# Allegro board backup.brd
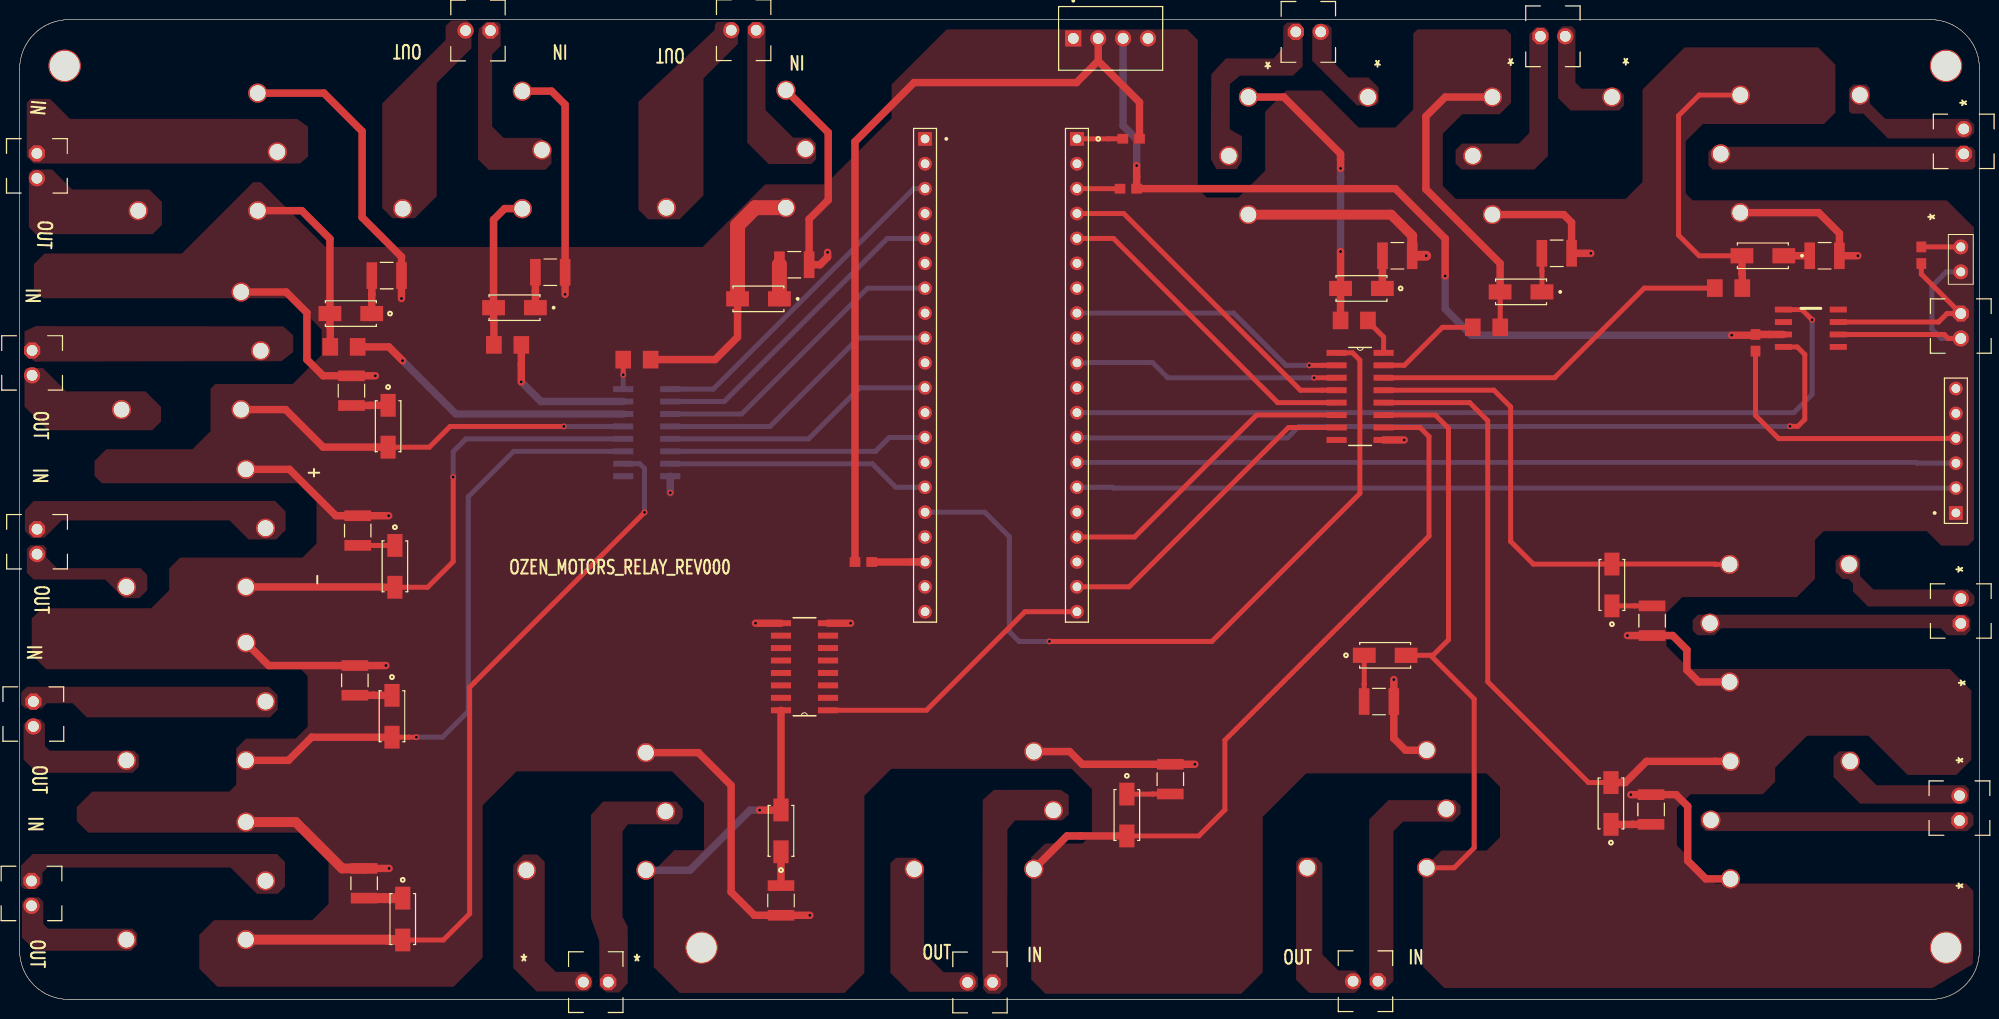
[diagram p0: board, top side]
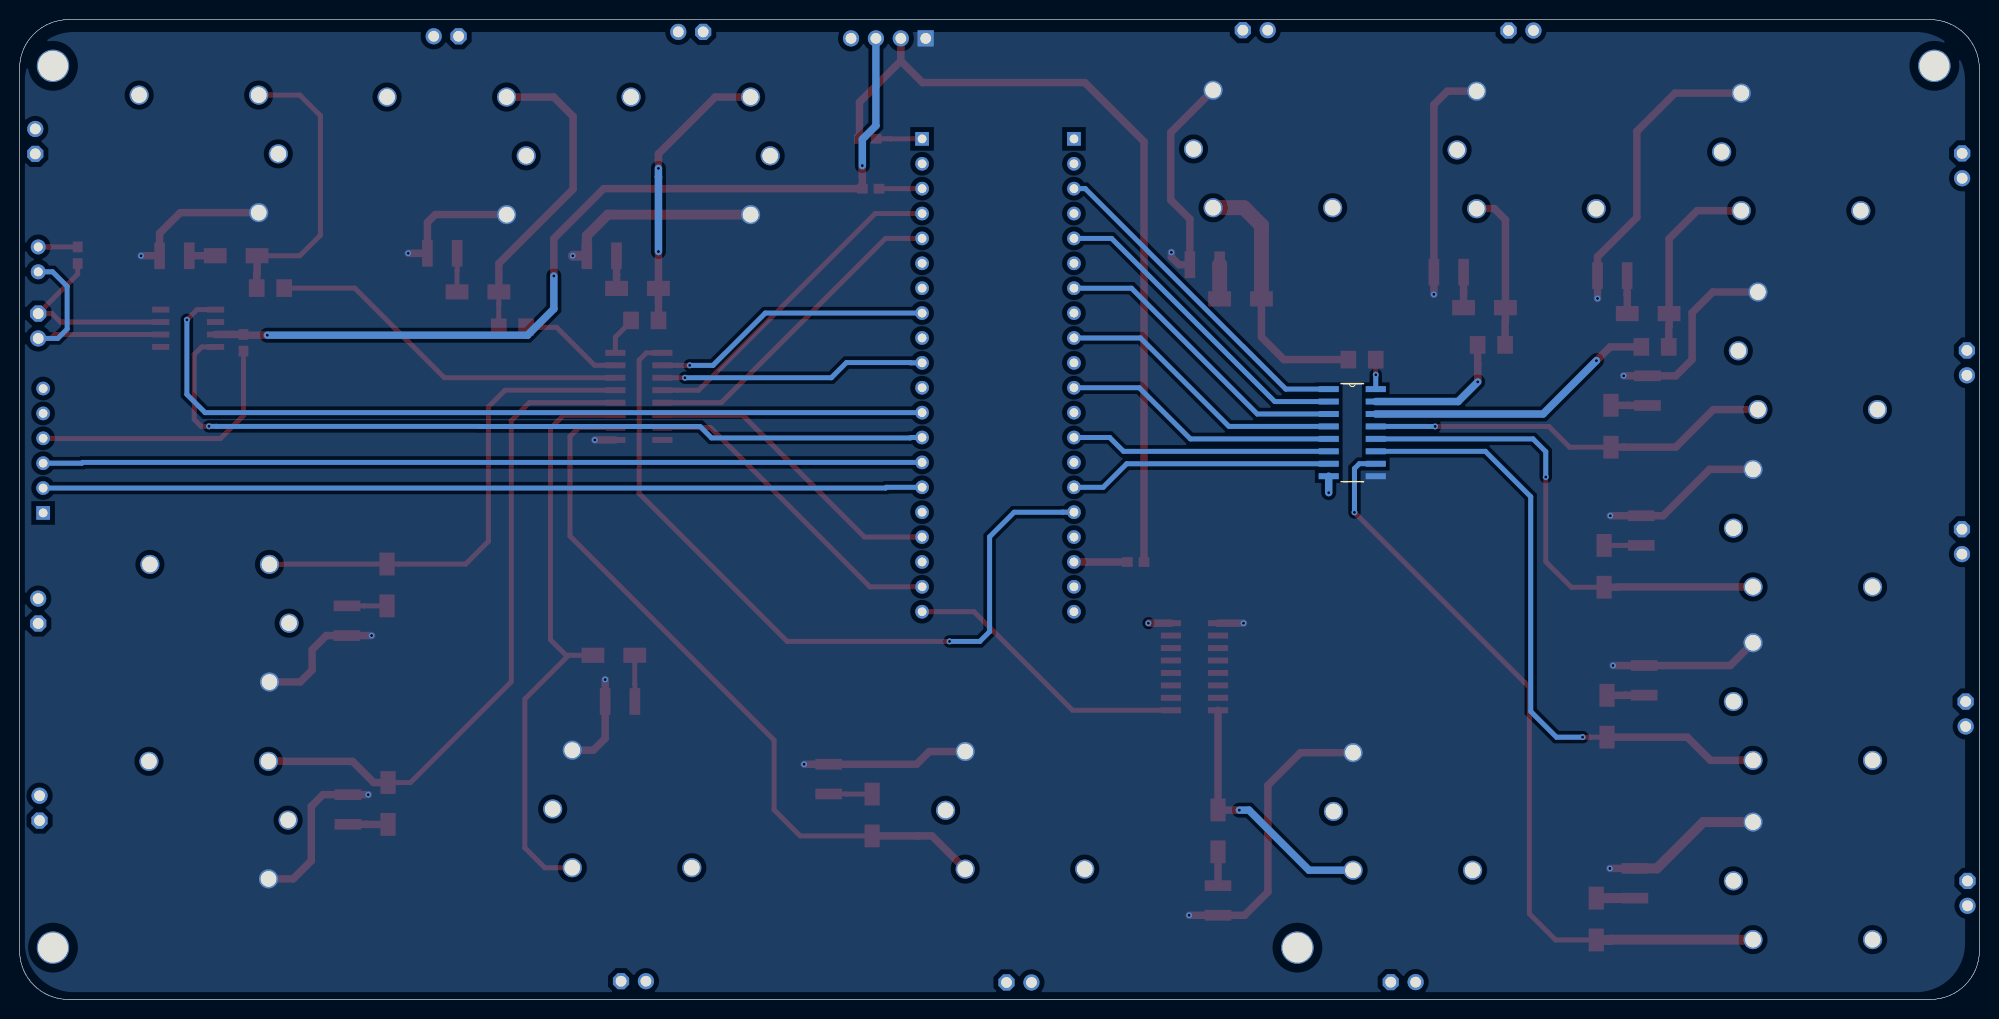
[diagram p1: board, bottom side, seen from below]

Outline 200 x 100 mm; copper layers: TOP, BOTTOM. Coordinates in mm from the lower left corner of the outline.
Outline path: 0,94.88 arc(1.5,98.5) 5.12,100 195,100 arc(196.91,99.62) 198.54,98.54 198.66,98.42 arc(199.65,96.93) 200,95.18 200,4.85 arc(198.58,1.42) 195.16,0 4.96,0 arc(1.45,1.45) 0,4.96 0,94.88 ; 0,95 arc(1.47,98.54) 5,100 195,100 arc(198.54,98.54) 200,95 200,5 arc(198.54,1.46) 195,0 5,0 arc(1.47,1.46) 0,5 0,95

## Placement (name value [footprint] x y rotation side)
D9  DIODE  [DIOM5226X240N]  75.4 71.5 180 top
D10  DIODE  [DIOM5226X240N]  50.5 70.6 180 top
D11  DIODE  [DIOM5226X240N]  33.8 70 180 top
D12  DIODE  [DIOM5226X240N]  37.6 58.5 270 top
D13  DIODE  [DIOM5226X240N]  38.3 44.2 270 top
D14  DIODE  [DIOM5226X240N]  38 28.9 270 top
D15  DIODE  [DIOM5226X240N]  39.1 8.2 270 top
D16  DIODE  [DIOM5226X240N]  77.7 17.2 90 top
D17  DIODE  [DIOM5226X240N]  153.23 72.21 180 top
D18  DIODE  [DIOM5226X240N]  177.9 75.9 180 top
D19  DIODE  [DIOM5226X240N]  162.5 42.3 90 top
D20  DIODE  [DIOM5226X240N]  162.4 20 90 top
D21  DIODE  [DIOM5226X240N]  139.36 35.12 0 top
D22  DIODE  [DIOM5226X240N]  113 18.82 270 top
D23  DIODE  [DIOM5226X240N]  136.94 72.56 180 top
J1  CON2  [1725656]  75.17 98.92 180 top
J2  CON2  [1725656]  48.05 98.89 180 top
J3  CON2  [1725656]  1.76 86.35 270 top
J4  CON2  [1725656]  1.28 66.24 270 top
J5  CON2  [1725656]  1.78 47.99 270 top
J6  CON2  [1725656]  1.4 30.4 270 top
J7  CON2  [1725656]  1.21 12.09 270 top
J8  CON2  [1725656]  60.08 1.76 180 top
J9  CON2  [1725656]  130.24 98.75 0 top
J10  CON2  [1725656]  155.2 98.3 0 top
J11  CON2  [1725656]  198.4 86.3 90 top
J12  CON2  [1725656]  198.1 38.37 90 top
J13  CON2  [1725656]  197.97 18.25 90 top
J14  CON2  [1725656]  138.63 1.86 180 top
J15  CON2  [1725656]  99.28 1.73 180 top
J16  CON20  [TE_2-87224-0]  92.4 63.7 270 top
J17  CON20  [TE_2-87224-0]  107.9 63.7 270 top
J18  CON2  [JUMPER2]  198.1 76.8 270 top
J19  CON2  [1725656]  198.1 70 270 top
J20  UART  [TE_4-103327-6]  197.6 56 90 top
J21  Power  [TE_1546215-4]  111.34 98.08 0 top
NOREF  -  [unnamed]  196.58 95.53 0 top
NOREF#2  -  [unnamed]  4.58 95.53 0 top
NOREF#3  -  [unnamed]  69.58 5.53 0 top
NOREF#4  -  [unnamed]  196.58 5.53 0 top
R1  0 OHM  [RESC3216X65]  63 65.3 0 top
R2  120K  [RESC3225X60N]  79.06 74.98 0 top
R3  120K  [RESC3225X60N]  54.16 74.22 0 top
R4  0 OHM  [RESC3216X65]  49.8 66.8 180 top
R5  120K  [RESC3225X60N]  37.46 73.88 0 top
R6  0 OHM  [RESC3216X65]  33.1 66.6 180 top
R7  120K  [RESC3225X60N]  33.87 62.13 90 top
R8  120K  [RESC3225X60N]  34.51 47.85 90 top
R9  120K  [RESC3225X60N]  34.22 32.56 90 top
R10  120K  [RESC3225X60N]  35.16 11.85 90 top
R11  0 OHM  [RESC3216X65]  136.2 69.3 180 top
R12  120K  [RESC3225X60N]  140.6 75.9 0 top
R13  120K  [RESC3225X60N]  156.87 76.15 0 top
R14  0 OHM  [RESC3216X65]  149.7 68.6 0 top
R15  120K  [RESC3225X60N]  184.2 75.9 0 top
R16  0 OHM  [RESC3216X65]  174.4 72.6 0 top
R17  120K  [RESC3225X60N]  166.6 38.65 270 top
R18  120K  [RESC3225X60N]  166.49 19.38 90 top
R19  120K  [RESC3225X60N]  138.73 30.4 0 top
R20  120K  [RESC3225X60N]  117.43 22.48 90 top
R21  0R  [0603]  86.1 44.64 180 top
R22  0R  [0603]  113.15 82.75 0 top
R23  0R  [0603]  113.44 87.84 0 top
R24  0R  [0603]  177.15 67.02 90 top
R25  120R  [0603]  194.08 75.96 90 top
R26  120K  [RESC3225X60N]  77.7 10.1 270 top
RL1  RELAY SPST  [JSM1A-12V-4]  78.2 92.8 180 top
RL2  RELAY SPST  [JSM1A-12V-4]  51.3 92.7 180 top
RL3  RELAY SPST  [JSM1A-12V-4]  24.3 92.5 180 top
RL4  RELAY SPST  [JSM1A-12V-4]  22.6 72.2 180 top
RL5  RELAY SPST  [JSM1A-12V-4]  23.1 54.1 180 top
RL6  RELAY SPST  [JSM1A-12V-4]  23.1 36.4 180 top
RL7  RELAY SPST  [JSM1A-12V-4]  23.1 18.1 180 top
RL8  RELAY SPST  [JSM1A-12V-4]  125.4 80.1 0 top
RL9  RELAY SPST  [JSM1A-12V-4]  150.3 80.1 0 top
RL10  RELAY SPST  [JSM1A-12V-4]  175.6 80.3 0 top
RL11  RELAY SPST  [JSM1A-12V-4]  174.5 32.4 0 top
RL12  RELAY SPST  [JSM1A-12V-4]  174.6 12.3 0 top
RL13  RELAY SPST  [JSM1A-12V-4]  143.6 25.44 180 top
RL15  RELAY SPST  [JSM1A-12V-4]  103.5 25.3 180 top
RL16  RELAY SPST  [JSM1A-12V-4]  63.92 25.19 180 top
U1  ULN2003A  [SOIC127P600X175-16N]  61.6 53.4 180 bottom
U2  ULN2003A  [SOIC127P600X175-16N]  139.2 57.1 0 top
U3  TJA1050  [SOP8]  182.8 68.5 270 top
U4  ULN2003A  [SOIC127P600X175-16N]  77.7 38.4 180 top

## Library data of the parts
D9 D10 D12-D17 D19-D23 = DIODE_16
D11 D18 = DIODE_17
J1-J15 J18 J19 = CON2_0
J16 = CON20_3
J17 = CON20_2
J20 = CON6_0
J21 = CON4_0
R1 R4 R6 R11 R14 R16 = RESISTOR_4
R2 R3 R5 R7-R10 R12 R13 R15 R17-R20 R26 = RESISTOR_6
R21-R25 = R
RL1 = RELAY SPST_0
RL2 RL4-RL13 RL15 RL16 = RELAY SPST_1
RL3 = RELAY SPST_2
U1 U2 = ULN2003A_1
U3 = TPS563200_1
U4 = ULN2003A_0

## Footprints (pads in the part's own frame, mm; a bottom-side part is the same pattern mirrored in y, then rotated)
0603
  rect 1.1x1 smd: 1(-0.85,0) 2(0.85,0)
1725656
  rrect 1.65x1.65 hole 1.1: 1(0,0)
  round 1.65 hole 1.1: 2(2.54,0)
DIOM5226X240N
  rect 2.33x1.55 smd: A(2.135,0) C(-2.135,0)
JSM1A-12V-4
  round 1.95 hole 1.6: 1(0,0) 2(0,12) 3(-2,6) 4(12.2,12)
JUMPER2
  round 1.524 hole 0.914: 1(0,0) 2(2.54,0)
RESC3216X65
  rect 1.6x1.8 smd: 1(-1.4,0) 2(1.4,0)
RESC3225X60N
  rect 1.09x2.72 smd: 1(-1.515,0) 2(1.515,0)
SOIC127P600X175-16N
  rect 2.057x0.61 smd: 1(-4.801,8.89) 2(-4.801,7.62) 3(-4.801,6.35) 4(-4.801,5.08) 5(-4.801,3.81) 6(-4.801,2.54) 7(-4.801,1.27) 8(-4.801,0) 9(0,0) 10(0,1.27) 11(0,2.54) 12(0,3.81) 13(0,5.08) 14(0,6.35) 15(0,7.62) 16(0,8.89)
SOP8
  rect 0.6x1.75 smd: 1(-1.905,-2.8) 2(-0.635,-2.8) 3(0.635,-2.8) 4(1.905,-2.8) 5(1.905,2.8) 6(0.635,2.8) 7(-0.635,2.8) 8(-1.905,2.8)
TE_2-87224-0
  rect 1.397x1.397 hole 0.889: 1(-24.13,0)
  round 1.397 hole 0.889: 2(-21.59,0) 3(-19.05,0) 4(-16.51,0) 5(-13.97,0) 6(-11.43,0) 7(-8.89,0) 8(-6.35,0) 9(-3.81,0) 10(-1.27,0) 11(1.27,0) 12(3.81,0) 13(6.35,0) 14(8.89,0) 15(11.43,0) 16(13.97,0) 17(16.51,0) 18(19.05,0) 19(21.59,0) 20(24.13,0)
TE_4-103327-6
  rect 1.398x1.398 hole 0.89: 1(-6.35,0)
  round 1.398 hole 0.89: 2(-3.81,0) 3(-1.27,0) 4(1.27,0) 5(3.81,0) 6(6.35,0)
TE_1546215-4
  rect 1.65x1.65 hole 1.1: 1(-3.81,0)
  round 1.65 hole 1.1: 2(-1.27,0) 3(1.27,0) 4(3.81,0)
unnamed
  round 3.302 hole 3.048: (0.013,-0.244)

## Nets
3V3: J21.2 R21.2 R23.2
5VCC: J21.3 R22.2 R24.2 U3.3(VDD)
+12V: J21.1 R2.2 R3.2 R5.2 R7.2 R8.2 R9.2 R10.2 R12.2 R13.2 R15.2 R17.2 R18.2 R19.2 R20.2 R26.2 RL1.1(COIL1) RL2.1 RL3.1 RL4.1 RL5.1 RL6.1 RL7.1 RL8.1 RL9.1 RL10.1 RL11.1 RL12.1 RL13.1 RL15.1 RL16.1 U1.9(COM) U2.9(COM) U4.9(COM)
GND: J16.19 J16.20 J17.2 J20.6 J21.4 U1.8(GND) U2.8(GND) U3.2(VSS) U3.8(RS) U4.8(GND)
F1: J16.4
F2: J16.6
F3: J16.8
F4: J16.10
F5: J16.12
F6: J16.14
F9: J17.6
F10: J17.7
F11: J17.9
F12: J17.11
F13: J17.16
F14: J17.18
P_RX: J17.14 J20.3
P_TX: J17.15 J20.2
PB15/OUT: D15.A RL7.2 U1.10(7C)
R_RLY_IN: D9.A R1.2(B) RL1.2(COIL2)
R_RLY_IN_77343: D23.A R11.2(B) RL8.2
RE1: J1.1 RL1.3(COMMON)
RE1/OUT: J1.2 RL1.4(NO)
RE2: J2.1 RL2.3
RE2/OUT: J2.2 RL2.4
RE3: J3.1 RL3.3
RE3/OUT: J3.2 RL3.4
RE4: J4.1 RL4.3
RE4/OUT: J4.2 RL4.4
RE5: J5.1 RL5.3
RE5/OUT: J5.2 RL5.4
RE6: J6.1 RL6.3
RE6/OUT: J6.2 RL6.4
RE7: J7.1 RL7.3
RE7/OUT: J7.2 RL7.4
RE8: J9.1 RL8.3
RE8/OUT: J9.2 RL8.4
RE9: J10.1 RL9.3
RE9/OUT: J10.2 RL9.4
RE10: J11.1 RL10.3
RE10/OUT: J11.2 RL10.4
RE11: J12.1 RL11.3
RE11/OUT: J12.2 RL11.4
RE12: J13.1 RL12.3
RE12/OUT: J13.2 RL12.4
RE13: J14.1 RL13.3
RE13/OUT: J14.2 RL13.4
RE14: D22.A RL15.2 U2.10(7C)
RE14/OUT: J15.2 RL15.4
RE14IN: J15.1 RL15.3
RE15: J8.1 RL16.3
RE15/OUT: J8.2 RL16.4
REL1: J16.3 U1.1(1B)
REL2: J16.5 U1.2(2B)
REL3: J16.7 U1.3(3B)
REL4: J16.9 U1.4(4B)
REL5: J16.11 U1.5(5B)
REL6: J16.13 U1.6(6B)
REL7: J16.15 U1.7(7B)
REL8: J16.16 U2.1(1B)
REL9: J17.8 U2.2(2B)
REL10: J17.10 U2.3(3B)
REL11: J17.4 U2.4(4B)
REL12: J17.5 U2.5(5B)
REL13: J17.17 U2.6(6B)
REL14: J17.19 U2.7(7B)
REL15: J17.20 U4.1(1B)
RXD: J17.13 U3.4(RXD)
TXD: J17.12 U3.1(TXD)
Y_RLY_IN: D11.A R6.2(B) RL3.2
Y_RLY_IN_77347: D18.A R16.2(B) RL10.2
N62759: J17.1 R23.1
N63115: J19.1 R25.1 U3.7(CANH)
N63135: J18.2 J19.2 U3.6(CANL)
N63175: J18.1 R25.2
N63380: J17.3 R22.1
N65482: J16.18 R21.1
N68083: D10.A R4.2(B) RL2.2
N68351: D12.A RL4.2 U1.13(4C)
N68452: D13.A RL5.2 U1.12(5C)
N68553: D14.A RL6.2 U1.11(6C)
N75685: D16.A RL16.2 U4.16(1C)
N75693: D16.C R26.1
N77327: D18.C R15.1
N77341: D23.C R12.1
N77357: R11.1(A) U2.16(1C)
N77361: R16.1(A) U2.14(3C)
N77381: R14.1(A) U2.15(2C)
N77393: D17.C R13.1
N77395: D17.A R14.2(B) RL9.2
N77409: D19.C R17.1
N77411: D19.A RL11.2 U2.13(4C)
N77427: D20.C R18.1
N77429: D20.A RL12.2 U2.12(5C)
N77445: D21.C R19.1
N77447: D21.A RL13.2 U2.11(6C)
N77463: D22.C R20.1
N80676: J20.4 R24.1
N20681583: D11.C R5.1
N20681625: D9.C R2.1
N20681734: R1.1(A) U1.16(1C)
N20681738: R6.1(A) U1.14(3C)
N20741071: R4.1(A) U1.15(2C)
N20741150: D10.C R3.1
N20741386: D12.C R7.1
N20741709: D13.C R8.1
N20741894: D14.C R9.1
N20742069: D15.C R10.1

Pads without a net: J16 1 2 17; J20 1 5; U3 5; U4 2 3 4 5 6 7 10 11 12 13 14 15

## Via types
v1: diameter 0.61, hole 0.305, TOP to BOTTOM, 37 vias

## Routing (per net, layer and track width the routed paths; a pad name or vN(x,y) marks a point on that pad's centre or on a via; arc(x,y) is an arc through that point)
3V3: length 83.1
  TOP w0.762: 110.07,95.79 114.29,91.57 R23.2 ; 110.07,95.79 J21.2 ; 110.07,95.79 107.86,93.57 91.28,93.57 85.25,87.55 R21.2
5VCC: length 92.3
  TOP w0.762: v1(174.72,67.79) 177.08,67.79 R24.2 178.57,67.87 178.57,67.87 U3.3 ; v1(145.48,73.84) 145.48,77.66 140.39,82.75 R22.2 114,83.99 v1(114,85.1)
  BOTTOM w0.762: v1(114,85.1) 114,87.79 112.61,89.17 J21.3 ; v1(145.48,73.84) 145.48,70.48 148.17,67.79 v1(174.72,67.79)
+12V: length 288.7
  TOP w0.762: RL4.1 27.2,72.2 29.32,70.08 29.32,65.31 30.98,63.65 R7.2 v1(36.31,63.65) ; RL3.1 31.06,92.5 34.96,88.6 34.96,79.81 38.97,75.79 R5.2 v1(38.97,71.54) ; RL16.1 69.27,25.19 72.61,21.85 72.61,10.96 74.99,8.59 R26.2 v1(80.65,8.59) ; R10.2 v1(37.71,13.37) ; v1(37.66,49.37) R8.2 32.27,49.37 27.54,54.1 RL5.1 ; v1(164.43,20.9) R18.2 169.05,20.9 170.23,19.71 170.23,14.15 172.08,12.3 RL12.1 ; v1(160.34,76.15) R13.2 158.38,79.3 157.58,80.1 RL9.1 ; v1(164.08,37.14) R17.2 168.7,37.14 170.15,35.69 170.15,33.61 171.36,32.4 RL11.1 ; RL10.1 183.6,80.3 185.72,78.18 R15.2 v1(187.6,75.9) ; RL2.1 54.29,92.7 55.67,91.32 R3.2 v1(55.67,71.96) ; v1(82.46,76.25) 82.46,75.77 81.68,74.98 R2.2 80.57,79.64 82.52,81.59 82.52,88.48 RL1.1 ; RL13.1 141.44,25.44 140.24,26.64 R19.2 v1(140.24,32.64) ; RL6.1 25.43,34.08 R9.2 v1(37.39,34.08) ; v1(119.94,24) R20.2 108.46,24 107.16,25.3 RL15.1 ; U2.9 v1(141.3,57.1) ; U4.9 v1(75.1,38.4)
  TOP w1.016: RL8.1 139.96,80.1 142.12,77.95 R12.2 v1(143.55,75.9) ; R10.2 32.91,13.37 28.18,18.1 RL7.1
GND: length 4
  TOP w0.762: U4.8 v1(84.8,38.4)
  BOTTOM w0.762: U1.8 v1(66.4,51.72)
P_RX: length 89.7
  BOTTOM w0.508: J17.14 193.57,54.81 193.65,54.73 J20.3
P_TX: length 89.7
  BOTTOM w0.508: J17.15 111.54,52.27 111.62,52.19 J20.2
PB15/OUT: length 79.2
  TOP w0.508: v1(63.78,49.71) 45.93,31.86 45.93,8.75 43.25,6.07 D15.A
  TOP w1.016: RL7.2 37.61,6.1 37.64,6.07 D15.A
  BOTTOM w0.508: U1.10 61.61,54.68 63.28,54.68 63.78,54.18 v1(63.78,49.71)
R_RLY_IN: length 26.9
  TOP w0.762: D9.A 73.27,67.6 70.97,65.3 R1.2
  TOP w1.524: D9.A 73.27,79.01 75.07,80.81 78.19,80.81 RL1.2
R_RLY_IN_77343: length 28.8
  TOP w0.762: R11.2 134.8,71.23 134.81,71.23 D23.A v1(134.81,76.33) ; v1(134.81,84.82) 134.81,85.71 134.81,85.71 134.81,86.3 129.01,92.1 RL8.2
  BOTTOM w0.762: v1(134.81,76.33) 134.81,83.93 134.81,83.93 v1(134.81,84.82)
RE14: length 73.8
  TOP w0.508: U2.10 142.92,58.37 143.84,57.45 143.84,47.29 123.01,26.46 123.01,19.35 120.34,16.69 D22.A
  TOP w0.762: D22.A 108.31,16.69 106.89,16.69 RL15.2
REL1: length 34.5
  BOTTOM w0.508: J16.3 91.24,82.75 70.78,62.29 U1.1
REL2: length 32.9
  BOTTOM w0.508: J16.5 88.56,77.67 71.91,61.02 U1.2
REL3: length 31.3
  BOTTOM w0.508: J16.7 86.54,72.59 73.7,59.75 U1.3
REL4: length 29.7
  BOTTOM w0.508: U1.4 76.59,58.48 85.62,67.51 J16.9
REL5: length 28.2
  BOTTOM w0.508: J16.11 85.74,62.43 80.52,57.21 U1.5
REL6: length 26.6
  BOTTOM w0.508: U1.6 87.35,55.94 88.76,57.35 J16.13
REL7: length 27
  BOTTOM w0.508: U1.7 87.02,54.67 89.42,52.27 J16.15
REL8: length 78.1
  TOP w0.508: v1(105.1,36.54) 121.67,36.54 136.78,51.65 136.78,65.25 136.04,65.99 U2.1
  BOTTOM w0.508: v1(105.1,36.54) 102.01,36.54 101.01,37.53 101.01,47.22 98.5,49.73 93.56,49.73 93.56,49.73 J16.16
REL9: length 28.7
  TOP w0.508: U2.2 132.94,64.72 132.93,64.71 v1(131.62,64.71)
  BOTTOM w0.508: J17.8 123.9,70.05 129.24,64.71 v1(131.62,64.71)
REL10: length 27.2
  TOP w0.508: U2.3 v1(132.1,63.45)
  BOTTOM w0.508: J17.10 109.06,64.97 109.09,65 115.62,65 117.16,63.45 v1(132.1,63.45)
REL11: length 34
  TOP w0.508: U2.4 132.94,62.18 132.93,62.17 130.72,62.17 112.68,80.21 J17.4
REL12: length 33.4
  TOP w0.508: J17.5 111.63,77.67 128.39,60.91 U2.5
REL13: length 31.7
  TOP w0.508: J17.17 113.78,47.19 126.23,59.64 U2.6
REL14: length 33.2
  TOP w0.508: U2.7 129.49,58.37 113.23,42.11 J17.19
REL15: length 29.6
  TOP w0.508: J17.20 102.6,39.57 92.54,29.51 U4.1
RXD: length 84.2
  TOP w0.508: v1(180.67,58.49) 181.48,58.49 182.19,59.2 182.19,65.82 181.42,66.6 U3.4
  BOTTOM w0.508: J17.13 109.06,57.35 109.1,57.31 129.39,57.31 130.55,58.47 153.15,58.47 153.16,58.48 179.9,58.48 179.91,58.49 v1(180.67,58.49)
TXD: length 86.8
  TOP w0.508: U3.1 181.89,70.41 v1(182.93,69.36)
  BOTTOM w0.508: J17.12 181.07,59.89 182.93,61.75 v1(182.93,69.36)
Y_RLY_IN: length 19.6
  TOP w0.762: RL3.2 28.8,80.5 31.67,77.63 D11.A 31.67,68.67 31.7,68.63 R6.2
Y_RLY_IN_77347: length 30
  TOP w0.508: RL10.2 171.4,92.3 169.3,90.2 169.3,78 171.4,75.9 D18.A
  TOP w0.762: R16.2 175.8,74.06 175.77,74.09 D18.A
N62759: length 4.7
  TOP w0.508: R23.1 111.12,87.84 111.1,87.83 J17.1
N63115: length 19.6
  TOP w0.508: U3.7 195.83,69.14 196.69,70 J19.1 194.08,74.03 R25.1
N63135: length 23.9
  TOP w0.508: J19.2 196.82,67.46 196.42,67.87 U3.6
  BOTTOM w0.508: J18.2 196.63,74.26 195.15,72.78 195.15,68.42 196.11,67.46 J19.2
N63175: length 4
  TOP w0.508: R25.2 196.88,76.81 196.88,76.8 J18.1
N63380: length 4.4
  TOP w0.508: R22.1 109.06,82.75 109.06,82.75 J17.3
N65482: length 5.5
  TOP w0.762: J16.18 91.12,44.65 91.11,44.64 R21.1
N68083: length 16.2
  TOP w0.762: RL2.2 51.29,80.72 49.5,80.72 48.37,79.58 D10.A 48.37,69.27 48.4,69.23 R4.2
N68351: length 41.5
  TOP w0.508: v1(55.54,58.48) 43.93,58.48 41.82,56.37 D12.A
  TOP w0.762: D12.A 36.27,56.37 36.27,56.37 30.98,56.37 27.15,60.2 RL4.2
  BOTTOM w0.508: U1.13 56.3,58.48 56.3,58.48 v1(55.54,58.48)
N68452: length 51.4
  TOP w0.508: D13.A 41.63,42.07 44.25,44.69 v1(44.25,53.32)
  TOP w0.762: RL5.2 36.93,42.1 36.97,42.07 D13.A
  BOTTOM w0.508: U1.12 45.56,57.21 44.25,55.91 v1(44.25,53.32)
N68553: length 64.4
  TOP w0.508: D14.A 39.73,26.77 v1(40.5,26.76)
  TOP w0.762: D14.A 29.81,26.77 27.44,24.4 RL6.2
  BOTTOM w0.508: U1.11 50.42,55.94 45.79,51.31 45.79,29.39 43.16,26.76 v1(40.5,26.76)
N75685: length 26.5
  TOP w0.762: U4.16 D16.A 77.68,19.32 v1(75.52,19.32)
  BOTTOM w0.762: v1(75.52,19.32) 74.54,19.32 68.41,13.19 RL16.2
N75693: length 3.5
  TOP w0.762: D16.C R26.1
N77327: length 2.7
  TOP w0.762: R15.1 D18.C
N77341: length 3.3
  TOP w0.762: D23.C 139.08,73.97 139.09,73.98 R12.1
N77357: length 4
  TOP w0.508: R11.1 137.6,69.2 139.2,67.6 U2.16
N77361: length 37.6
  TOP w0.508: U2.14 156.65,63.45 165.8,72.6 R16.1
N77381: length 10.7
  TOP w0.508: R14.1 145.2,68.6 141.32,64.72 U2.15
N77393: length 3.9
  TOP w0.508: D17.C 155.36,74.35 155.35,74.36 R13.1
N77395: length 32.3
  TOP w0.508: D17.A 151.09,71 151.1,70.99 R14.2
  TOP w0.762: RL9.2 145.49,92.1 143.52,90.13 143.52,82.69 151.09,75.12 D17.A
N77409: length 4.1
  TOP w0.508: R17.1 164.8,40.17 164.8,40.17 D19.C
N77411: length 50.7
  TOP w0.508: RL11.2 173.07,44.4 173.04,44.44 D19.A 161.3,44.44 161.29,44.43 154.48,44.43 152.16,46.75 152.16,60.47 150.46,62.18 U2.13
N77427: length 4.1
  TOP w0.762: R18.1 164.58,17.87 164.57,17.87 D20.C
N77429: length 68
  TOP w0.508: U2.12 147.98,60.91 149.83,59.07 149.83,32.42 160.11,22.14 D20.A
  TOP w0.762: D20.A 163.87,22.14 166.03,24.3 173.04,24.3 173.04,24.3 RL12.2
N77445: length 4.7
  TOP w0.508: D21.C 137.23,32.21 137.21,32.19 R19.1
N77447: length 60.9
  TOP w0.508: D21.A 143.98,35.12 ; 143.98,35.12 148.45,30.66 148.45,15.48 146.4,13.44 RL13.2 ; 143.98,35.12 144.24,35.12 145.83,36.71 145.83,58.29 144.48,59.64 U2.11
N77463: length 4.4
  TOP w0.508: R20.1 115.64,20.97 115.63,20.96 D22.C
N80676: length 28
  TOP w0.508: J20.4 196.45,57.27 196.42,57.24 179.51,57.24 177.15,59.6 R24.1
N20681583: length 3.9
  TOP w0.762: R5.1 35.94,71.96 35.94,71.95 D11.C
N20681625: length 3.5
  TOP w1.524: D9.C 77.54,74.98 R2.1
N20681734: length 3
  TOP w0.508: R1.1 v1(61.6,63.76)
  BOTTOM w0.508: v1(61.6,63.76) U1.16
N20681738: length 29.9
  TOP w0.762: R6.1 37.68,66.6 v1(39.08,65.2)
  BOTTOM w0.762: U1.14 44.53,59.75 v1(39.08,65.2)
N20741071: length 15
  TOP w0.762: R4.1 51.2,64.8 51.2,64.8 v1(51.2,63.02)
  BOTTOM w0.762: U1.15 53.2,61.02 v1(51.2,63.02)
N20741150: length 3.6
  TOP w0.762: D10.C 52.64,72.3 52.64,72.3 R3.1
N20741386: length 3.7
  TOP w0.762: D12.C 35.8,60.64 35.79,60.62 R7.1
N20741709: length 3.8
  TOP w0.508: D13.C 36.3,46.34 36.3,46.34 R8.1
N20741894: length 3.8
  TOP w0.762: D14.C 36.15,31.04 36.14,31.05 R9.1
N20742069: length 3.9
  TOP w1.016: R10.1 37.2,10.34 37.21,10.34 D15.C

## Copper pours and planes (outline as drawn; the poured copper is in the pictures)
+12V on BOTTOM: 199.46,5.74 198,2.2 194.46,0.74 6.46,0.74 2.93,2.2 1.46,5.74 1.46,93.74 2.93,97.28 6.46,98.74 194.46,98.74 198,97.27 199.46,93.74
GND on TOP: 69.69,76.79 76.08,83.18 82.23,83.18 88.99,89.95 88.99,93.38 94.62,99.01 119.14,99.01 120.24,97.91 120.24,82.77 121.17,81.84 124.36,81.84 127.11,84.59 127.11,90.6 129.27,92.76 132.88,92.76 136.66,88.99 140.38,88.99 142.22,90.82 142.22,98.57 142.67,99.01 151.67,99.01 152.21,98.48 152.21,91.51 151.04,90.34 147.23,90.34 145.23,88.35 145.23,83.04 146.57,81.71 163.9,81.71 165.62,83.42 165.62,92.87 169.93,97.18 183.53,97.18 185.31,95.39 185.31,90.51 184.14,89.35 171.92,89.35 171.85,89.41 170.03,87.59 170.03,82.27 170.75,81.55 196.68,81.55 199.44,78.79 199.44,46.91 198.85,46.32 196.1,46.32 194.63,47.79 184.12,47.79 183.23,46.9 183.23,42.92 181.37,41.06 169.68,41.06 168.06,39.45 168.06,36.07 170.4,33.73 196.98,33.73 199.18,31.53 199.18,24.44 197.65,22.91 192.67,22.91 188.67,26.91 182.42,26.91 179.16,23.65 179.16,22.21 177.88,20.94 170.54,20.94 169.13,19.53 169.13,15.72 173.01,11.84 198.63,11.84 199.38,11.08 199.38,5.35 199.32,3.61 195.19,1.16 145.4,1.16 143.2,3.35 143.2,13.28 145.12,15.2 149.72,15.2 151.08,16.56 151.08,21.69 149.71,23.07 131.3,23.07 126.87,18.64 126.87,2.77 124.67,0.57 104.69,0.57 103.24,2.02 103.24,14.5 104.65,15.91 108.46,15.91 109.42,16.87 109.42,21.47 107.36,23.53 88.96,23.53 86.21,20.78 86.21,2.69 84.18,0.66 67.36,0.66 64.71,3.3 64.71,13.13 66.82,15.24 69.85,15.24 69.85,20.01 66.58,23.27 50.72,23.27 47.25,19.8 47.25,4.25 44.3,1.29 20.19,1.29 18.33,3.15 18.33,6.58 19.84,8.09 29.87,8.09 31.52,9.74 31.52,14.07 28.57,17.02 7,17.02 5.83,18.19 5.83,19.63 7.41,21.21 21.39,21.21 22.11,21.93 22.11,25.63 23.11,26.62 28.17,26.62 29.4,27.85 29.4,33.01 28.71,33.7 2.79,33.7 2.75,33.66 1.24,35.17 1.24,38.88 2.28,39.92 13.42,39.92 15.26,41.76 15.26,43.97 16.38,45.09 28.86,45.09 30.3,46.53 30.3,50.89 28.52,52.68 8.39,52.68 7.64,53.44 7.64,54.95 8.84,56.15 17.63,56.15 19.48,58 19.48,62.33 19.96,62.81 27.86,62.81 30.82,65.76 30.82,68.37 27.62,71.57 2.38,71.57 1.45,72.5 1.45,75.04 2.55,76.14 16.56,76.14 23.85,83.42 24.61,83.42 31.23,76.79 31.23,76.79
RE1 on TOP: 74.7,99.72 75.75,99.72 76.12,99.34 76.12,90.78 78.95,87.95 80.7,87.95 81.28,87.37 81.28,85.73 80.82,85.27 76.43,85.27 74.25,87.44 74.25,99.27
RE1/OUT on TOP: 71.13,99.77 72.95,99.77 73.31,99.43 73.31,97.53 69.79,94.01 69.79,82.06 67.35,79.62 64.15,79.62 63.15,80.61 63.15,91.61 70.94,98.96 70.95,99.45
RE2 on TOP: 47.58,99.75 48.85,99.75 49.1,99.5 49.1,97.33 48.22,96.46 48.22,89.1 49.39,87.93 53.21,87.93 54.29,86.85 54.29,85.31 53.65,84.67 47.86,84.67 46.79,85.74 46.79,98.96
RE2/OUT on TOP: 44.06,99.92 45.71,99.92 46.12,99.51 46.12,97.08 42.58,93.54 42.58,81.98 40.33,79.73 38.04,79.73 37.01,80.76 37.01,91.45 43.48,97.91 43.48,99.34
RE3 on TOP: 1.12,91.91 3.1,91.91 5.14,89.87 13.03,89.87 18.81,89.87 28.31,89.86 29.43,89.07 29.44,86.02 28.61,85.32 1.43,85.32 0.73,86.02 0.73,91.53
RE3/OUT on TOP: 1.33,84.7 3.32,84.7 5.36,82.66 13.25,82.66 14.53,81.38 14.53,79.05 13.58,78.11 1.65,78.11 0.95,78.81 0.95,84.32
RE4 on TOP: 1.68,68.73 1.68,68.73 3.56,68.72 26.91,68.69 27.92,67.78 27.92,66.07 26.72,65.14 12.26,65.12 1.57,65.1 0.5,65.85 0.5,68.19
RE4/OUT on TOP: 0.71,64.44 2.38,64.44 4.76,62.06 12.84,62.06 14.43,60.47 14.43,58.98 13.55,58.1 2.9,58.1 0.5,60.5 0.5,64.23
RE5 on TOP: 23.37,46.95 26.19,46.95 27.14,47.9 27.14,49.8 26.07,50.88 1.42,50.86 0.54,49.91 0.55,47.81 1.22,47.11 2.55,47.13 4.31,48.89 21.42,48.89
RE5/OUT on TOP: 10.63,40.95 12.21,40.95 13.02,41.76 13.02,43.33 12.34,44.02 3.83,44.02 2.74,45.1 2.74,46.09 2.46,46.36 1.12,46.36 0.74,45.98 0.74,43.54 1.42,42.86 8.73,42.86
RE6 on TOP: 26.33,31.06 26.33,29.58 25.54,28.79 6.85,28.79 5.41,30.23 2.79,30.23 2.26,29.7 0.55,29.7 0.17,30.08 0.17,31.33 0.74,31.91 25.48,31.91
RE6/OUT on TOP: 12.17,24.9 12.17,23.75 11.55,23.14 1.74,23.14 0.41,24.47 0.41,28.08 0.92,28.6 2.12,28.6 2.59,28.13 2.59,25.87 3.07,25.39 11.65,25.39 11.67,25.41
RE7 on TOP: 0.44,11.27 1.76,11.27 2.32,11.83 2.32,12.93 2.87,13.47 21.51,13.47 24.19,10.79 26.35,10.79 27.08,11.51 27.08,14.03 26.27,14.84 1.33,14.84 0.14,13.65 0.14,11.57
RE7/OUT on TOP: 12.01,6.74 12.01,5.58 11.39,4.97 1.58,4.97 0.24,6.31 0.24,9.91 0.76,10.43 1.96,10.43 2.42,9.96 2.42,7.7 2.9,7.22 11.48,7.22 11.5,7.24
RE8 on TOP: 123.1,96.04 121.62,94.42 121.6,92.27 121.57,88.88 121.57,87.27 121.59,85.72 122.14,84.74 124.2,84.74 124.73,85.57 124.75,88.09 123.49,88.82 123.5,90.67 123.52,93.43 124.55,94.28 129.95,94.28 130.95,95.23 130.94,96.05 130.94,99.36 130.59,99.71 129.37,99.71 128.97,99.31 128.95,97.18 127.97,96.03
RE8/OUT on TOP: 136.48,91.24 138.38,91.24 138.69,91.55 138.69,93.07 137.66,94.1 135.63,94.1 133.89,95.84 133.89,99.15 133.54,99.5 132.32,99.5 131.91,99.09 131.91,95.81
RE9 on TOP: 154.77,99.24 155.66,99.24 155.97,98.93 155.97,86.1 154.58,84.7 147.16,84.7 146.54,85.32 146.54,86.7 147.19,87.35 152.98,87.35 154.08,88.45 154.08,98.55
RE9/OUT on TOP: 157.43,99.33 158.39,99.33 158.78,98.94 158.78,93.59 159.41,92.95 163.12,92.95 163.74,92.34 163.74,91.24 163.23,90.72 158.28,90.72 157.01,92 157.01,98.9
RE10 on TOP: 173.25,87.12 172.96,87.12 172.34,86.5 172.34,85.12 172.75,84.71 199.3,84.71 199.58,84.99 199.58,86.64 199.19,87.03 173.34,87.03
RE10/OUT on TOP: 187.13,93.37 188.46,93.37 188.82,93.01 188.82,91.45 190.4,89.87 198.88,89.87 199.48,89.27 199.48,88.45 198.91,87.88 190.67,87.88 188.15,90.4 186.95,90.4 186.69,90.66 186.69,92.93
RE11 on TOP: 171.23,37.16 172.94,37.16 173.66,37.89 196.03,37.89 196.76,37.16 198.58,37.16 199.09,37.67 199.09,38.86 198.69,39.27 171.28,39.27 170.74,38.72 170.74,37.65
RE11/OUT on TOP: 185.93,45.36 187.41,45.36 187.83,44.94 187.83,43.2 189.19,41.84 198.82,41.84 199.51,41.15 199.51,40.46 199.15,40.1 188.64,40.1 187.1,41.64 187.1,42.45 186.64,42.91 186.04,42.91 185.34,43.61 185.34,44.76
RE12 on TOP: 171.53,18.74 171.53,17.74 172.09,17.18 198.77,17.18 199.4,17.82 199.4,18.77 199.06,19.12 196.94,19.12 196.93,19.1 171.89,19.1
RE12/OUT on TOP: 186.08,25.32 187.18,25.32 187.69,24.81 187.69,23.68 189.51,21.86 198.54,21.86 198.94,21.46 198.94,20.33 198.58,19.98 187.82,19.98 185.11,22.69 185.11,24.75 185.68,25.32 186.08,25.32
RE13 on TOP: 138.64,0.92 139.22,0.92 140.2,1.89 140.2,17.16 141.19,18.15 146.25,18.15 147.05,18.95 147.05,19.77 146.48,20.34 139.7,20.34 137.72,18.37 137.72,1.51 138.32,0.92 138.64,0.92
RE13/OUT on TOP: 130.72,14.5 132.31,14.5 132.95,13.86 132.95,4.58 134.58,2.95 136.27,2.95 136.79,2.43 136.79,1.18 136.28,0.66 131.61,0.66 130.27,2 130.27,14.05
RE14/OUT on TOP: 89.43,14.46 91.5,14.46 92.3,13.66 92.3,4.78 94.31,2.77 97.28,2.77 97.81,2.24 97.81,1.3 97.28,0.78 90.79,0.78 88.86,2.71 88.86,13.9
RE14IN on TOP: 98.29,20.37 99.42,21.38 106.23,21.4 107.07,20.86 107.08,18.87 106.4,18.27 101.59,18.26 100.8,17.34 100.79,8.5 100.79,1.36 100,0.57 98.8,0.57 98.26,1.11 98.26,9.55
RE15 on TOP: 59.55,20.2 67.02,20.19 67.66,19.46 67.66,18.57 67.22,17.87 62.09,17.88 61.53,17.16 61.53,9.03 61.53,8.43 62.06,7.42 62.06,6.95 62.06,6.11 62.06,1.66 61.19,0.7 59.98,0.7 59.17,1.24 59.15,5.96 58.31,8.28 58.31,18.82
RE15/OUT on TOP: 51.44,14.79 52.83,14.79 53.6,14.02 53.6,3.94 54.73,2.81 57.12,2.81 57.14,2.83 57.81,2.83 58.44,2.19 58.44,1.3 57.96,0.82 52.76,0.82 50.38,3.2 50.38,13.74

## Text on the board
Ref Des/Silkscreen Top: OZEN_MOTORS_RELAY_REV000 | * | OUT | IN | + | -
NCLEGEND-1-2: FIGURE | SIZE | 12.0 | 35.0 | 35.039 | 36.0 | 43.307 | 62.992 | 120.0 | DRILL CHART: TOP to BOTTOM | ALL UNITS ARE IN MILS | TOLERANCE | +3.0/-12.0 | +0.0/-0.0 | PLATED | QTY | 37 | 40 | 6 | 2 | 36 | 60 | 4
